# EAGLE board LED-Schematic (EAGLE 9.6.2)
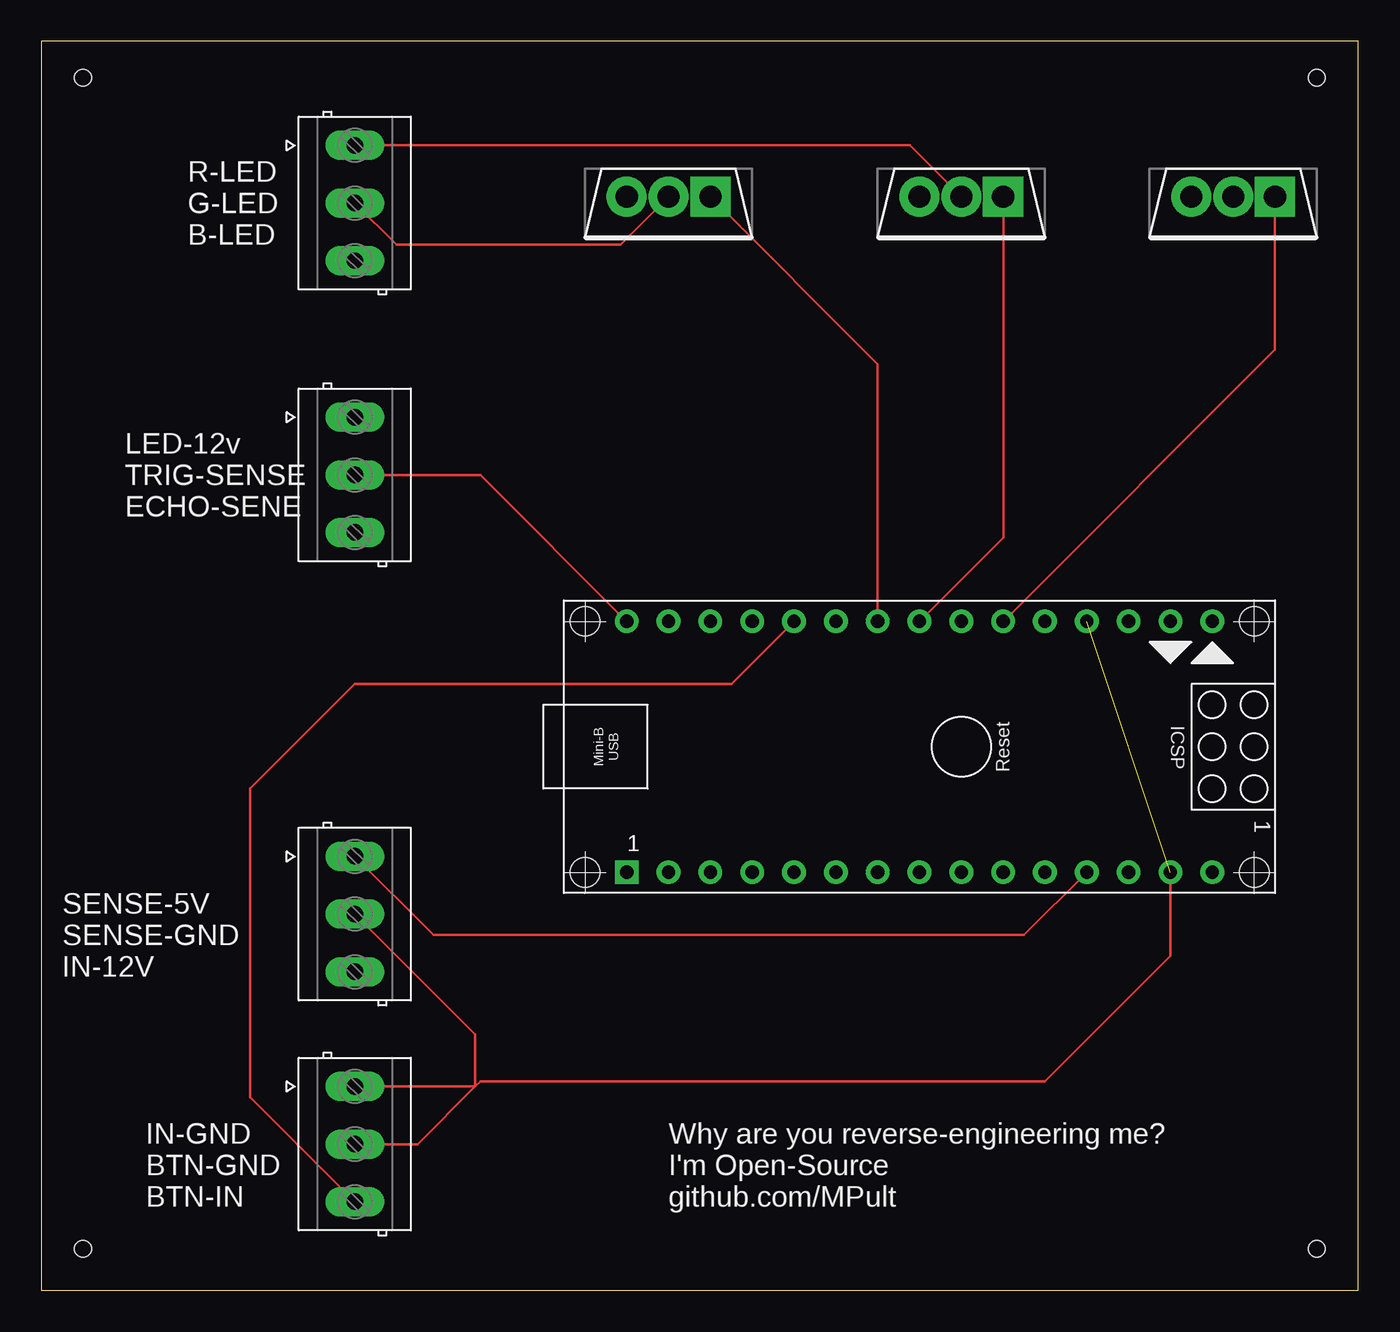
[diagram p0: board, top side]
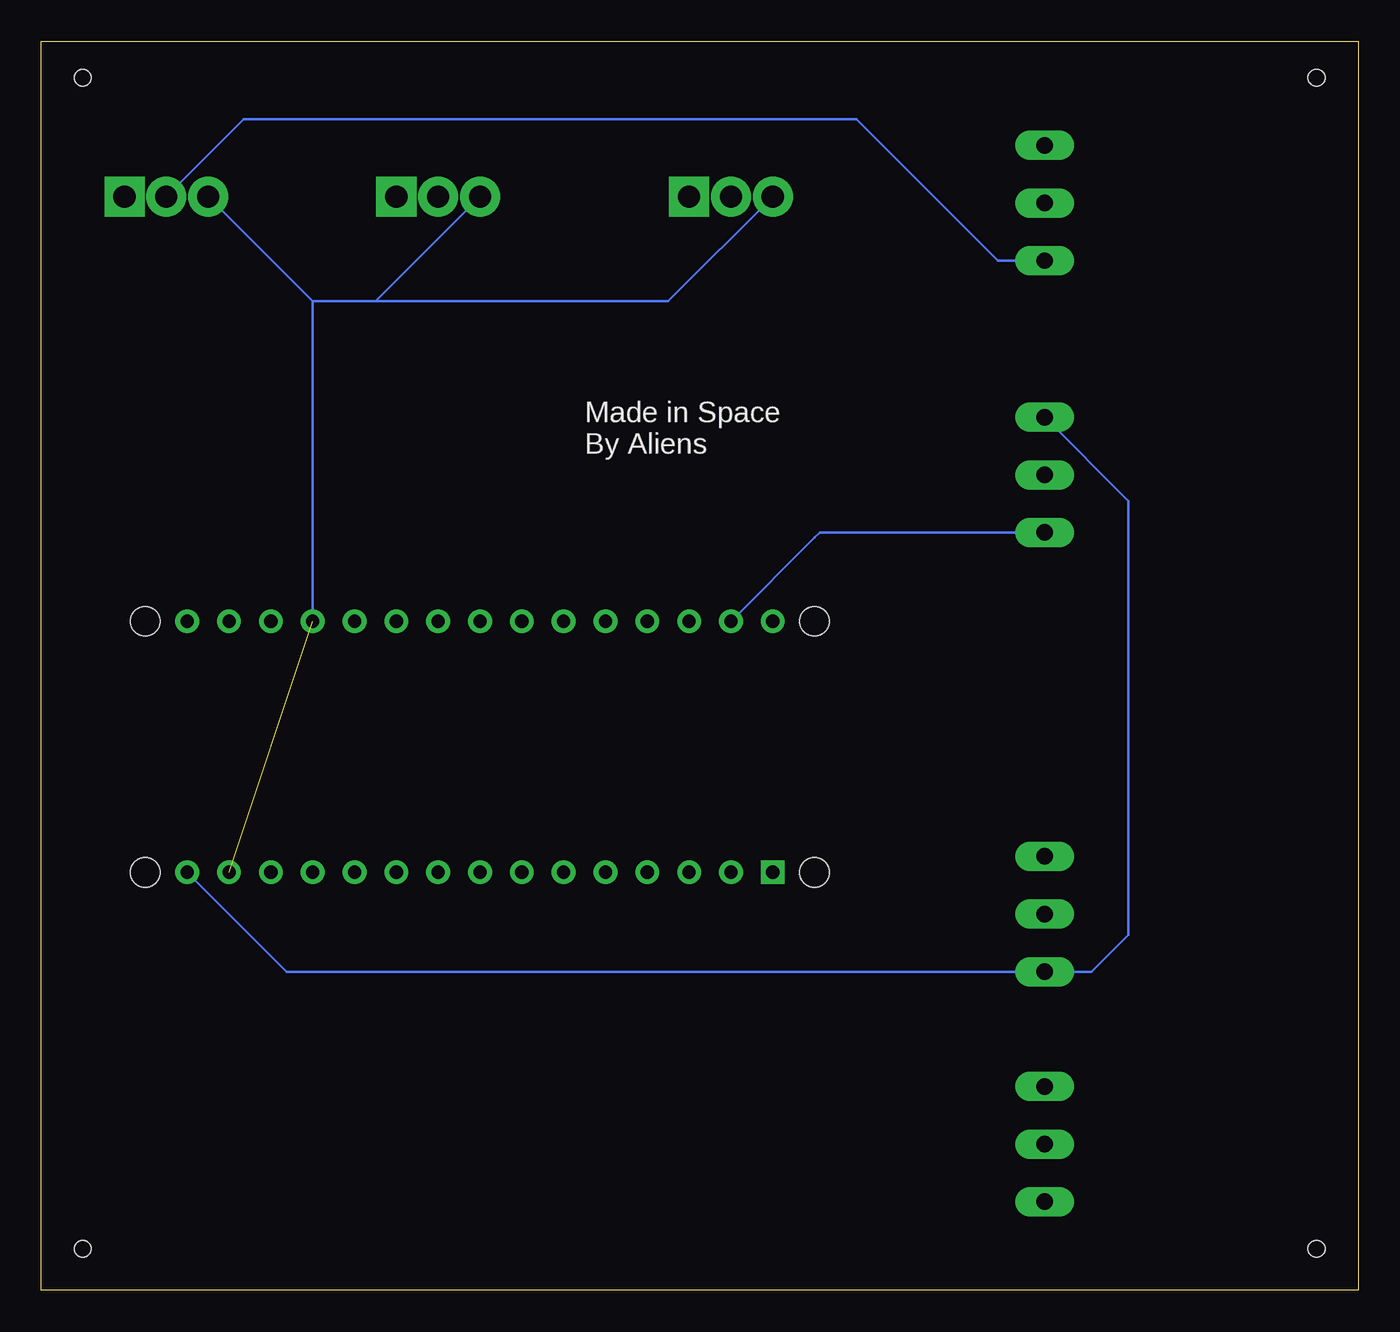
[diagram p1: board, bottom side, seen from below]

Size 79.99 x 75.87 mm. Coordinates in mm from the lower left corner, seen from the top.
Outline: 0,0 79.99,0 79.99,75.87 0,75.87 0,0
Copper layers (1*16): Top 0.035mm / dielectric 1.6mm / Bottom 0.035mm
Design rules "jlcpcb-2layers *": minimum track width 5mil, minimum drill 0.3mm, track to track 5mil, track to pad 5mil, pad to pad 0.5mil, via to via 5mil, smd to smd 5mil, copper to edge 0.2mm, drill to drill 6mil, minimum pad ring 10mil, minimum via ring 3mil, stop-mask expansion 4mil, vias tented up to drill 0mil, thermal gap 10mil
Holes 1 mm at 2.54,73.66 2.54,2.54 77.47,2.54 77.47,73.66

## Footprints (pad centres in the part's own frame; a part is rotated, then mirrored left to right if it is on the bottom)
ARDUINO_NANO = drill 0.8 square: 1 -20.32,-7.62 | drill 0.8: 2 -17.78,-7.62; 3 -15.24,-7.62; 4 -12.7,-7.62; 5 -10.16,-7.62; 6 -7.62,-7.62; 7 -5.08,-7.62; 8 -2.54,-7.62; 9 0,-7.62; 10 2.54,-7.62; 11 5.08,-7.62; 12 7.62,-7.62; 13 10.16,-7.62; 14 12.7,-7.62; 15 15.24,-7.62; 16 15.24,7.62; 17 12.7,7.62; 18 10.16,7.62; 19 7.62,7.62; 20 5.08,7.62; 21 2.54,7.62; 22 0,7.62; 23 -2.54,7.62; 24 -5.08,7.62; 25 -7.62,7.62; 26 -10.16,7.62; 27 -12.7,7.62; 28 -15.24,7.62; 29 -17.78,7.62; 30 -20.32,7.62 | hole 1.778: -22.86,-7.62; -22.86,7.62; 17.78,7.62; 17.78,-7.62
INFINEON_IRLB8721PBF_0 = drill 1.35 pad 0.305 square: 1 -0.378,2.54 | drill 1.35 pad 0.305: 2 -0.378,0; 3 -0.378,-2.54
DG350-3.5-03P = drill 1 long: 1 -3.5,0; 2 0,0; 3 3.5,0

## Placement (x,y rotation side)
ARDUINO_NANO1  [ARDUINO_NANO]  55.88,33.02 0 top
Q1  INFINEON_IRLB8721PBFINFINEON_IRLB8721PBF_0_0  [INFINEON_IRLB8721PBF_0]  55.88,66.04 270 top
Q2  INFINEON_IRLB8721PBFINFINEON_IRLB8721PBF_0_0  [INFINEON_IRLB8721PBF_0]  38.1,66.04 270 top
Q3  INFINEON_IRLB8721PBFINFINEON_IRLB8721PBF_0_0  [INFINEON_IRLB8721PBF_0]  72.39,66.04 270 top
X1  DG3XX-03-3.5  [DG350-3.5-03P]  19.05,66.04 270 top
X2  DG3XX-03-3.5  [DG350-3.5-03P]  19.05,49.53 270 top
X3  DG3XX-03-3.5  [DG350-3.5-03P]  19.05,22.86 270 top
X4  DG3XX-03-3.5  [DG350-3.5-03P]  19.05,8.89 270 top

## Library data of the parts
ARDUINO_NANO1 = ArduinoNanoV30
Q1-Q3 = Infineon - IRLB8721PbF; CENTROID_NOT_SPECIFIED: No; DATASHEET: https://upverter.com/datasheet/6023de1dc29e00ae136963535d37ebb95ee78d8c.pdf; DIGIKEY_DESCRIPTION: TRANS MOSFET N-CH 30V 62A TO-220AB; DIGIKEY_PART_NUMBER: IRLB8721PBF-ND; IMPORTED_FROM: octopart; IPC_LAND_PATTERN_NAME: TO-220; LEAD_FREE: yes; MF: Infineon; MOUNTING_TYPE: through hole; MOUSER_PART_NUMBER: 942-IRLB8721PBF; MPN: IRLB8721PbF; NUM_PINS: 3; PACKAGE: TO220AB-3; PREFIX: Q; ROHS: yes; SYMBOL_0_0: N-Channel Enhanced MOSFET; TEMPERATURE_RANGE_HIGH: +175°C; TEMPERATURE_RANGE_LOW: -55°C; TYPE: transistor
X1-X4 = degson

## Nets
5V: ARDUINO_NANO1.12 X3.1
12V: ARDUINO_NANO1.15 X2.1 X3.3
B-GATE: ARDUINO_NANO1.21 Q3.1
B-LED: Q3.2 X1.3
BTN-IN: ARDUINO_NANO1.26 X4.3
ECHO-SENSE: ARDUINO_NANO1.29 X2.3
G-GATE: ARDUINO_NANO1.24 Q2.1
G-LED: Q2.2 X1.2
GND: ARDUINO_NANO1.14 ARDUINO_NANO1.19 Q1.3 Q2.3 Q3.3 X3.2 X4.1 X4.2
R-GATE: ARDUINO_NANO1.23 Q1.1
R-LED: Q1.2 X1.1
TRIG-SENSE: ARDUINO_NANO1.30 X2.2

## Tracks (layer width: path | path; a pad name or v marks a point on that pad's centre or on a via)
5V
  Top 0.152: ARDUINO_NANO1.12 59.69,21.59 23.82,21.59 X3.1
12V
  Bottom 0.152: ARDUINO_NANO1.15 65.08,19.36 X3.3 16.2,19.36 13.97,21.59 13.97,47.95 X2.1
B-GATE
  Top 0.152: Q3.1 74.93,57.15 ARDUINO_NANO1.21
B-LED
  Bottom 0.152: X1.3 21.9,62.54 30.48,71.12 67.69,71.12 Q3.2
BTN-IN
  Top 0.152: X4.3 12.7,11.74 12.7,30.48 19.05,36.83 41.91,36.83 ARDUINO_NANO1.26
ECHO-SENSE
  Bottom 0.152: ARDUINO_NANO1.29 33.02,45.72 32.71,46.03 X2.3
G-GATE
  Top 0.152: Q2.1 50.8,56.26 ARDUINO_NANO1.24
G-LED
  Top 0.152: Q2.2 35.18,63.5 21.59,63.5 X1.2
GND  (1 unrouted)
  Top 0.152: X4.1 26.36,12.39 | 26.36,12.39 26.67,12.7 60.96,12.7 68.58,20.32 ARDUINO_NANO1.14 | X4.2 22.86,8.89 26.36,12.39 | X3.2 26.36,15.55 26.36,12.39
  Bottom 0.152: Q3.3 63.5,60.07 | 63.5,60.07 ARDUINO_NANO1.19 | Q1.3 59.69,60.07 | 59.69,60.07 63.5,60.07 | Q2.3 41.91,60.07 59.69,60.07
R-GATE
  Top 0.152: Q1.1 58.42,45.72 ARDUINO_NANO1.23
R-LED
  Top 0.152: X1.1 52.76,69.54 Q1.2
TRIG-SENSE
  Top 0.152: ARDUINO_NANO1.30 26.67,49.53 21.59,49.53 20.32,49.53 X2.2

## Text on the board
tPlace: R-LED / G-LED / B-LED | LED-12v / TRIG-SENSE / ECHO-SENE | SENSE-5V / SENSE-GND / IN-12V | IN-GND / BTN-GND / BTN-IN | Why are you reverse-engineering me? / I'm Open-Source / github.com/MPult
bPlace: Made in Space / By Aliens